# Altium PCB plobot_final.PcbDoc (part 1 of 2)
Units mm, origin at the board's own origin, x right, y up, seen from the top; angles counter-clockwise.
Board outline 90.01 x 133 mm, 2 copper layers (Top Layer, Bottom Layer); 119 components, 93 nets, 451 pads, 126 vias.
Unrouted connection lines stored in the file: 91.
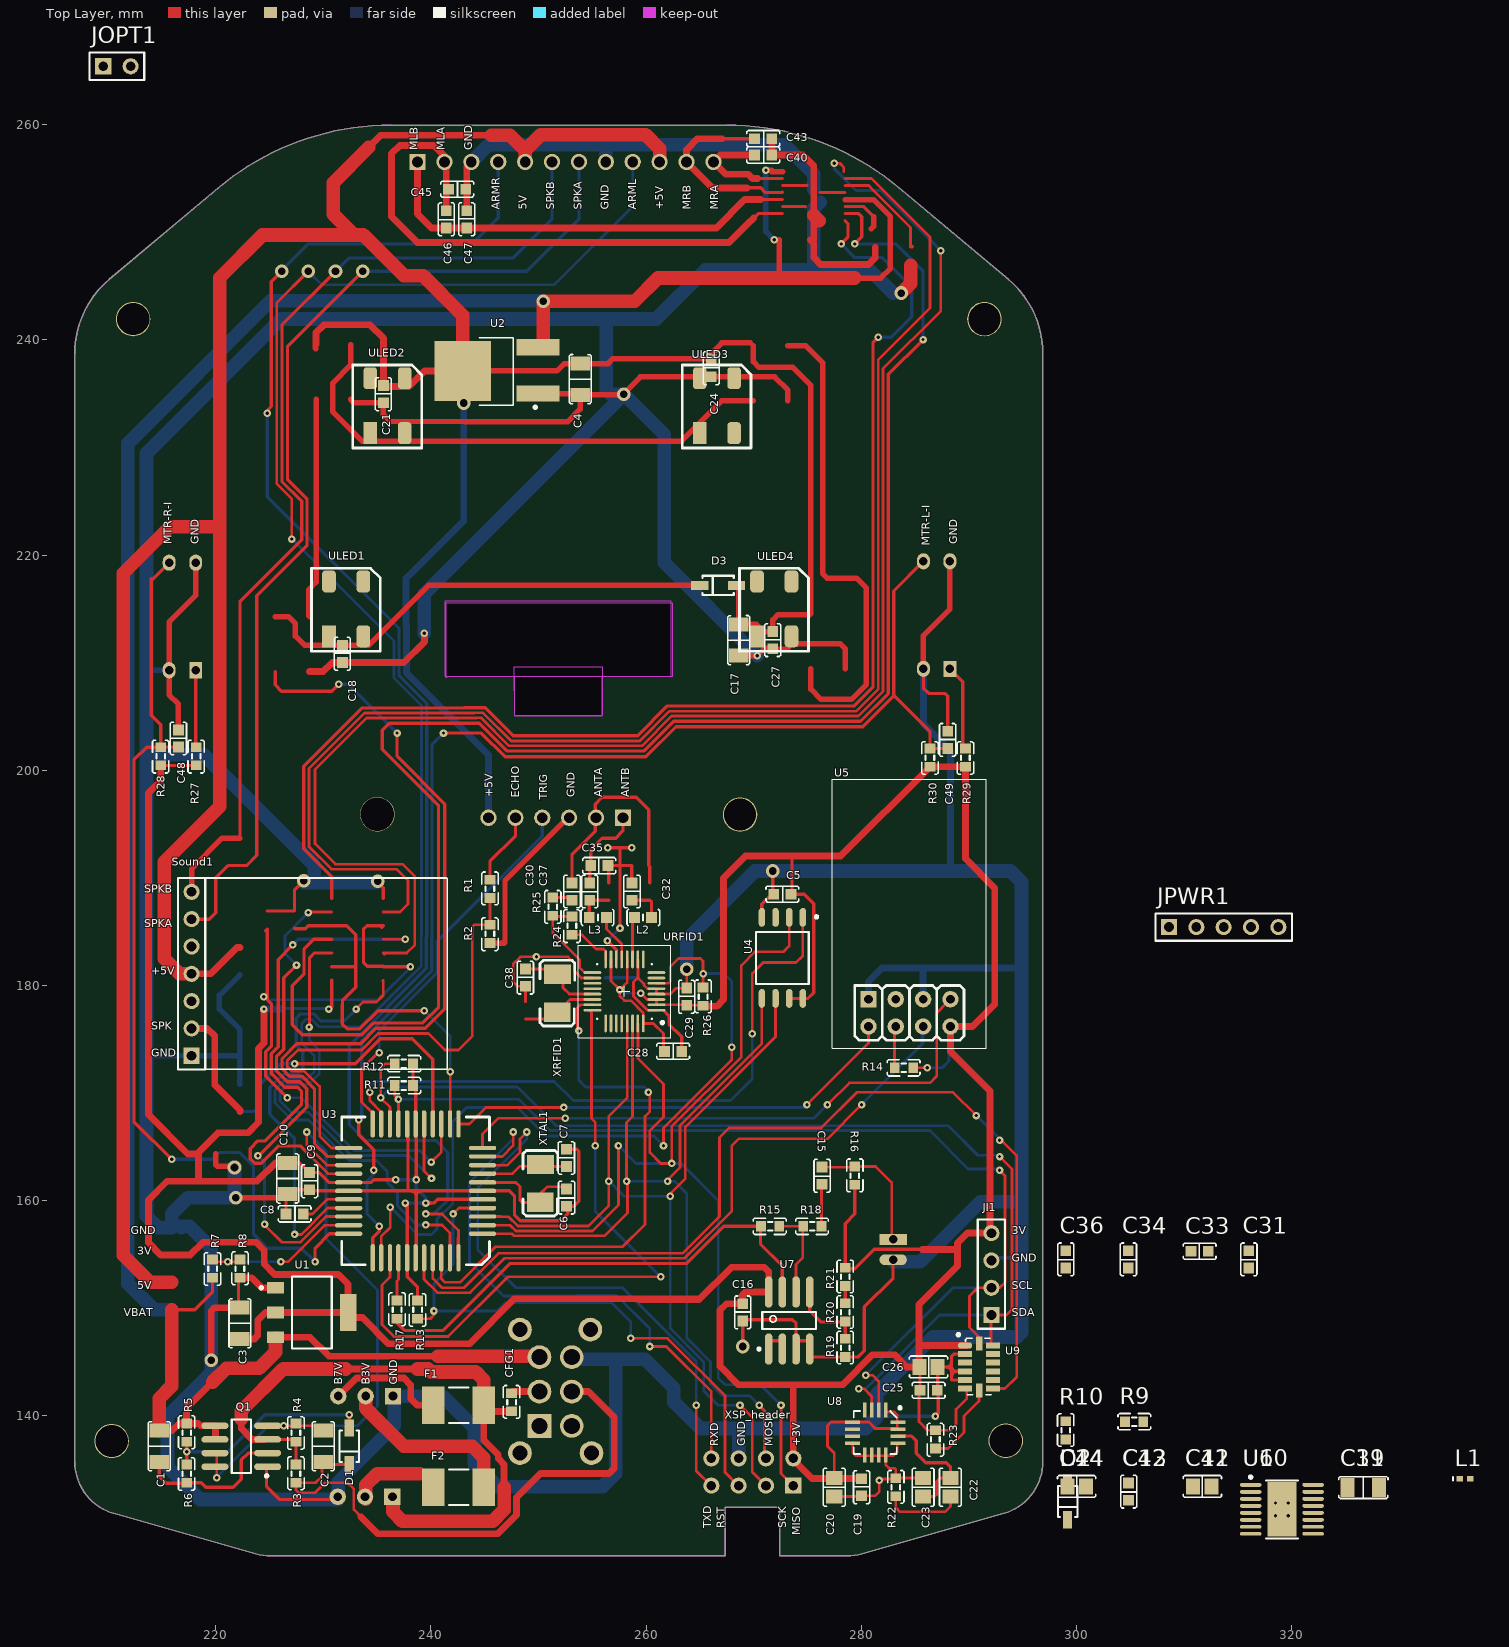
[diagram p0: Top Layer view]
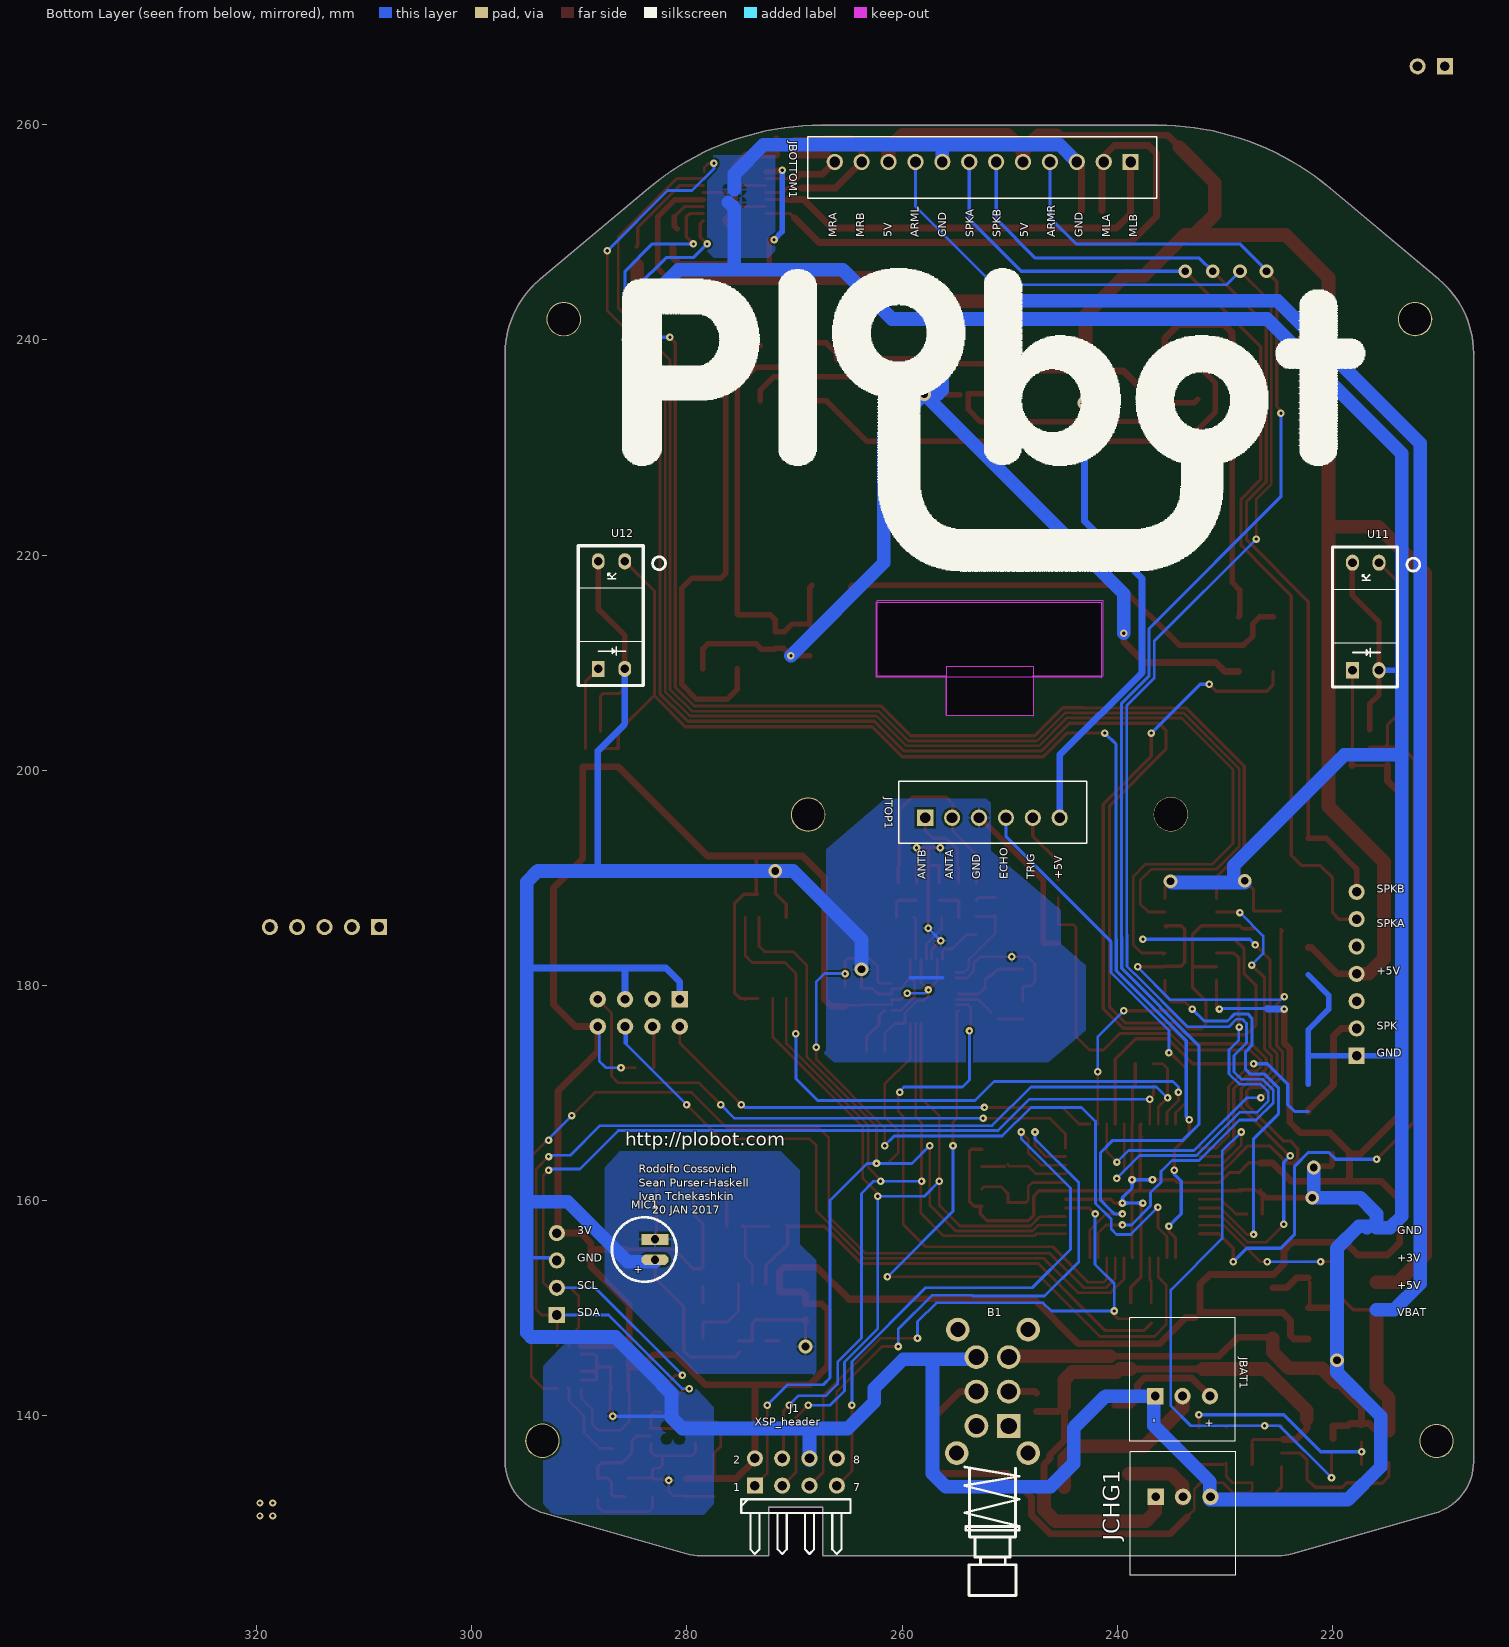
[diagram p1: Bottom Layer view, seen from below]

## Layer stack, top to bottom
Top Layer: signal copper 0.0356
Dielectric: dielectric 0.32, FR-4, Dk 4.8
Bottom Layer: signal copper 0.0356

## Board outline
210.515,130.925 223.715,127.154 ccw(c225.089,131.961) 225.089,126.961 267.36,126.961 267.36,131.508 272.415,131.508 272.415,126.961 278.688,126.961 ccw(c278.688,131.961) 280.062,127.154 293.262,130.925 ccw(c291.889,135.733) 296.889,135.733 296.889,238.727 ccw(c287.889,238.727) 293.674,245.621 293.674,245.622 283.555,254.112 ccw(c267.485,234.961) 267.485,259.961 236.292,259.961 ccw(c236.292,234.961) 220.223,254.112 210.104,245.622 210.103,245.621 ccw(c215.889,238.727) 206.889,238.727 206.883,238.727 206.883,135.733 206.889,135.733 ccw(c211.889,135.733)
cut-out: 262.442,215.576 262.442,208.676 241.542,208.676 241.442,208.576 241.442,215.576
cut-out: 247.752,209.626 255.905,209.626 255.905,205.105 247.777,205.08

## Design rules (kind name [scope] priority, off if disabled: settings)
Clearance [All] p1: gap=0.203
FabricationTestpoint [(IsPad And (OnTopLayer Or OnBottomLayer))] p1: side=3 testpointundercomponent=TRUE minsize=1.016 maxsize=2.54 preferedsize=1.524 minholesize=0 maxholesize=1.016 preferedholesize=0.813 testpointgrid=0.025 allowsidetop=TRUE allowsidebottom=TRUE usegrid=TRUE gridtolerance=0
HoleSize [All] p1: absolutevalues=TRUE maxlimit=3.81 minlimit=0.305 maxpercent=80.000 minpercent=20.000
MinimumSolderMaskSliver [All] p1: minsoldermaskwidth=0.127
PolygonConnect [All] p1: connectstyle=Relief reliefconductorwidth=0.254 reliefentries=4 polygonreliefangle="90 Angle"
RoomDefinition audio [InComponentClass('audio')] p1: confinementstyle=ConfineIn formatcopy=TRUE lockcomponents=FALSE outline 298.044,131.216 302.895,131.216 302.895,137.211 298.044,137.211
RoomDefinition rfid [InComponentClass('rfid')] p2: confinementstyle=ConfineIn formatcopy=TRUE lockcomponents=FALSE outline 195.834,121.412 312.674,121.412 312.674,268.986 195.834,268.986
RoomDefinition motion [InComponentClass('motion')] p3: confinementstyle=ConfineIn formatcopy=TRUE lockcomponents=FALSE outline 185.166,120.142 311.658,120.142 311.658,269.494 185.166,269.494
RoomDefinition inout [InComponentClass('inout')] p4: confinementstyle=ConfineIn formatcopy=TRUE lockcomponents=FALSE outline 186.436,121.666 311.15,121.666 311.15,266.954 186.436,266.954
RoomDefinition cpu [InComponentClass('cpu')] p5: confinementstyle=ConfineIn formatcopy=TRUE lockcomponents=FALSE outline 208.534,116.205 294.386,116.205 294.386,200.152 208.534,200.152
RoomDefinition connections [InComponentClass('connections')] p6: confinementstyle=ConfineIn formatcopy=TRUE lockcomponents=FALSE outline 207.264,121.412 296.926,121.412 296.926,260.35 207.264,260.35
RoutingVias [All] p1: holewidth=0.3 width=0.7 viastyle="Through Hole" minholewidth=0.305 minwidth=0.61 maxholewidth=0.711 maxwidth=1.27
SilkToSilkClearance [All] p1: silktosilkclearance=0.025
SilkscreenOverComponentPads SilkToSolderMaskClearance [IsPad] p1: minsilkscreentomaskgap=0.025
SolderMaskExpansion [All] p1: expansion=0
Width [All] p1: maxlimit=25.4 minlimit=0.203 preferedwidth=0.254
23 further rules are at their usual default settings.

## Classes and differential pairs
component class audio: C11 C12 C13 C14 C15 C16 D2 L1 MIC1 R15 R16 R17 R18 R19 R20 R21 U6 U7
component class inout: C17 C18 C19 C20 C21 C22 C23 C24 C25 C26 C27 D3 R22 R23 U8 U9 ULED1 ULED2 ULED3 ULED4 ULED_INNER1 ULED_OUTER2 ULED_OUTER3
component class motion: B1_1 C11 C12 C13 C14 C40 C43 C45 C46 C47 C48 C49 JSPI R27 R28 R29 R30 U6 U11 U12
component class connections: B1 C1 C2 C3 C4 CFG1 D1 F1 F2 JBAT1 JBOTTOM1 JCHG JCHG1 JI1 Ji2 JOPT1 JPWR1 JTOP JTOP1 Q1 R1 R2 R3 R4 R5 R6 U1 U2
component class rfid: C28 C29 C30 C31 C32 C33 C34 C35 C36 C37 C38 L2 L3 R24 R25 R26 URFID1 XRFID1
component class cpu: C5 C6 C7 C8 C9 C10 J1 R7 R8 R9 R10 R11 R12 R13 R14 R? Sound1 U3 U4 U5 XTAL1

## Components (designator, comment, footprint, x,y, rotation, side; value= is the part's Value field where it differs from the comment)
B1 "PS22F03 non-locked" KGPS22F03 251.427,142.342 r0 bottom locked
C1 "10uF" CAPC3216N 214.757,137.16 r270 top
C2 "1uF" CAPC3216N 229.997,137.16 r90 top
C3 "10uF" CAPC3216N 222.25,148.59 r90 top
C4 "10uF" CAPC3216N 253.873,236.347 r90 top
C5 "100nF" CAPC1608N 272.669,188.468 r180 top
C6 "18pF" CAPC1608N 252.603,160.274 r90 top
C7 "18pF" CAPC1608N 252.603,163.957 r270 top
C8 "100nF" CAPC1608N 227.33,158.75 r180 top
C9 "100nF" CAPC1608N 228.727,161.798 r270 top
C10 "10 uF" CAPC3216N 226.695,162.052 r90 top
C11 "10uF" CAPC3216N 326.669,133.325 r0 top
C12 "10nF/16V" CAPC2012N 311.709,133.426 r0 top
C13 "10uF" CAPC1608N 304.851,132.944 r90 top
C14 "2.2uF" CAPC2012N 300.025,133.426 r0 top
C15 "100nF" CAPC1608N 276.352,162.306 r90 top
C16 "100nF" CAPC1608N 268.986,149.606 r270 top
C17 "10 uF" CAPC3216N 268.605,212.09 r270 top
C18 "100nF" CAPC1608N 231.775,210.82 r270 top
C19 "100nF" CAPC1608N 280.035,133.35 r270 top
C20 "1uF" CAPC2012N 277.495,133.35 r270 top
C21 "100nF" CAPC1608N 235.585,234.95 r270 top
C22 "470nF" CAPC2012N 288.29,133.35 r270 top
C23 "10nF/16V" CAPC2012N 285.75,133.35 r90 top
C24 "100nF" CAPC1608N 266.065,237.363 r270 top
C25 "100nF" CAPC1608N 286.258,142.367 r0 top
C26 "1uF" CAPC2012N 286.258,144.526 r0 top
C27 "100nF" CAPC1608N 271.78,212.09 r270 top
C28 "100nF" CAPC1608N 262.509,173.863 r180 top
C29 "100nF" CAPC1608N 263.779,178.943 r270 top
C30 "100nF" CAPC1608N 253.111,188.722 r90 top
C31 "15pF" CAPC1608N 316.027,154.534 r90 top
C32 "47pF" CAPC1608N 258.699,188.722 r270 top
C33 "180pF" CAPC1608N 311.455,155.296 r0 top
C34 "47pF" CAPC1608N 304.825,154.534 r90 top
C35 "180pF" CAPC1608N 255.651,191.135 r0 top
C36 "15pF" CAPC1608N 299.009,154.534 r90 top
C37 "15pF" CAPC1608N 254.762,188.722 r90 top
C38 "15pF" CAPC1608N 248.793,180.721 r270 top
C39 "10uF" CAPC3216N 326.669,133.325 r0 top
C40 "100nF" CAPC1608N 270.891,257.175 r180 top
C41 "10nF/16V" CAPC2012N 311.709,133.426 r0 top
C42 "100nF" CAPC1608N 304.851,132.944 r90 top
C43 "100nF" CAPC1608N 270.891,258.699 r180 top
C44 "2.2uF" CAPC2012N 300.025,133.426 r0 top
C45 "100nF" CAPC1608N 242.443,254 r180 top
C46 "100nF" CAPC1608N 241.427,251.206 r90 top
C47 "100nF" CAPC1608N 243.332,251.206 r270 top
C48 "100nF" CAPC1608N 216.535,202.946 r270 top
C49 "100nF" CAPC1608N 288.036,202.819 r270 top
CFG1 "NC" RESC1608N 247.5,141.25 r90 top
D1 "MBR0540" SOD123/X.85 232.41,137.16 r90 top
D2 "CDZVT2R3.3B" SOD123/X.85 299.187,132.029 r90 top
D3 "MBR0540" SOD123/X.85 266.7,217.17 r0 top
F1 "miniSMDC260F/12" miniSMDC260F/12 242.57,140.97 r0 top
F2 "miniSMDC260F/12" miniSMDC260F/12 242.57,133.35 r180 top
J1 "XSP" HDR2X4H 273.685,133.499 r180 bottom locked
JBAT1 "Charger" S3B-XH-A(LF)(SN) 233.934,147.32 r270 bottom locked
JBOTTOM1 "Header 12" JST-B12B-XH 238.76,256.54 r0 bottom locked
JCHG1 "Charger" "S3B-XH-A( FEMALE )" 233.883,126.961 r90 bottom
JI1 "Header 4" HDR1X4 292.1,149.352 r90 top
JOPT1 "Header 2" HDR1X2 209.55,265.43 r0 top
JPWR1 "Component" HDR1X5 308.61,185.42 r0 top
JTOP1 "w/lock" JST-B6B-XH 257.854,195.58 r180 bottom locked
L1 "Inductor" INDC1005AL 336.118,134.137 r0 top
L2 "2.2uH" INDC1608N 259.715,186.309 r0 top
L3 "2.2uH" INDC1608N 255.524,186.309 r180 top
MIC1 "Mic2" electret_6mm 283.972,155.448 r270 bottom
Q1 "IRF7319" SO-8_L 222.377,137.16 r180 top
R1 "10k" RESC1608N 245.491,188.976 r90 top
R2 "10K" RESC1608N 245.491,184.785 r270 top
R3 "10K" RESC1608N 227.457,134.62 r90 top
R4 "100K" RESC1608N 227.457,138.43 r270 top
R5 "100K" RESC1608N 217.297,138.43 r90 top
R6 "300K" RESC1608N 217.297,134.62 r270 top
R7 "20k" RESC1608N 219.71,153.67 r270 top
R8 "10k" RESC1608N 222.25,153.67 r90 top
R9 "10k" RESC1608N 305.359,139.446 r0 top
R10 "10k" RESC1608N 299.009,138.633 r90 top
R11 "10k" RESC1608N 237.49,170.688 r0 top
R12 "10k" RESC1608N 237.49,172.72 r0 top
R13 "10k" RESC1608N 238.76,149.86 r270 top
R14 "10k" RESC1608N 283.972,172.339 r180 top
R15 "100k" RESC1608N 271.526,157.607 r180 top
R16 "3.3k" RESC1608N 279.4,162.306 r90 top
R17 "10k" RESC1608N 236.855,149.86 r90 top
R18 "22" RESC1608N 275.463,157.607 r180 top
R19 "10k" RESC1608N 278.511,146.304 r90 top
R20 "10k" RESC1608N 278.511,149.606 r90 top
R21 "10k" RESC1608N 278.511,152.908 r90 top
R22 "10k" RESC1608N 283.21,133.35 r90 top
R23 "10k" RESC1608N 286.893,137.795 r270 top
R24 "820" RESC1608N 253.111,185.547 r270 top
R25 "5.1k" RESC1608N 251.333,187.325 r270 top
R26 "10k" RESC1608N 265.303,178.943 r90 top
R27 "1K" RESC1608N 218.186,201.295 r270 top
R28 "5.1k" RESC1608N 214.884,201.295 r270 top
R29 "1K" RESC1608N 289.687,201.168 r270 top
R30 "5.1k" RESC1608N 286.385,201.168 r270 top
Sound1 "MP3 - M3A3" MP3 217.754,173.457 r90 top
U1 "AZ1117CH-3.3" SOT223 228.6,149.86 r180 top
U2 "AZ1084CD-5.0" AZ1084CD-5.0 245.751,237.109 r180 top
U3 "MCU" atmega644p 237.617,161.163 r270 top locked
U4 "W25Q64BVSIG" W25Q64BVSIG 272.542,182.626 r270 top
U5 "ESP8266" ESP8266 282.981,177.444 r90 top
U6 "DRV8833" DRV8833 319.1,131.293 r0 top
U7 "LM358D" LM358D 273.304,148.844 r90 top
U8 "L3G4200D" LGA16-4X4 281.305,138.43 r270 top
U9 "ADXL345BCCZ" ADXL345 290.957,144.526 r0 top
U10 "DRV8833" DRV8833 319.1,131.293 r0 top
U11 "ITR9608" ITR9608 217.491,213.607 r180 bottom
U12 "ITR9608" ITR9608 287.595,213.734 r180 bottom
ULED1 "WS2812B" WS2812B 232.203,214.962 r90 top locked
ULED2 "WS2812B" WS2812B 236.038,233.854 r90 top locked
ULED3 "WS2812B" WS2812B 266.66,233.854 r90 top locked
ULED4 "WS2812B" WS2812B 271.994,214.962 r90 top locked
URFID1 "MFRC52202HN1" MFRC52202HN1 257.991,179.439 r180 top locked
XRFID1 "7A-27.120MAAJ-T" XTAL 252.095,179.197 r90 top
XTAL1 "ABM7-8.000MHZ-D2Y-T" XTAL 250.52,161.519 r90 top

## Footprints (in the part's own frame and the unit in brackets; to place one, negate y for a bottom-side part, rotate by r counter-clockwise, add the part's x,y. Pads: shape width x height; smd on the part's side, far side on the other; paste and mask are expansions set on the pad)
ADXL345 [mm] "BGA, 14-Leads, Body 5.0x3.0mm,  Pitch 0.80mm"
  oct 1.3x0.55 smd: 1(-1.3,2)
  rect 1.3x0.55 smd: 2(-1.3,1.2) 3(-1.3,0.4) 4(-1.3,-0.4) 5(-1.3,-1.2) 6(-1.3,-2) 8(1.3,-2) 9(1.3,-1.2) 10(1.3,-0.4) 11(1.3,0.4) 12(1.3,1.2) 13(1.3,2)
  rect 0.6x1.3 smd: 7(0,-2.2) 14(0,2.2)
  silkscreen extent -2.05,-2.59 1.12,3.12, body extent -1.5,-2.5 1.5,2.5, height 1
atmega644p [mil]
  oval 16x100 smd: 1(167.45,282.95) 2(136.45,282.95) 3(104.45,282.95) 4(73.45,282.95) 5(41.45,282.95) 6(10.45,282.95) 7(-20.55,282.95) 8(-52.55,282.95) 9(-83.55,282.95) 10(-115.55,282.95) 11(-146.55,282.95) 23(-146.55,-207.05) 24(-115.55,-207.05) 25(-83.55,-207.05) 26(-52.55,-207.05) 27(-20.55,-207.05) 28(10.45,-207.05) 29(41.45,-207.05) 30(73.45,-207.05) 31(104.45,-207.05) 32(136.45,-207.05) 33(167.45,-207.05)
  oval 100x16 smd: 12(-234.55,194.95) 13(-234.55,163.95) 14(-234.55,131.95) 15(-234.55,100.95) 16(-234.55,68.95) 17(-234.55,37.95) 18(-234.55,6.95) 19(-234.55,-25.05) 20(-234.55,-56.05) 21(-234.55,-88.05) 22(-234.55,-119.05) 34(255.45,-119.05) 35(255.45,-88.05) 36(255.45,-56.05) 37(255.45,-25.05) 38(255.45,6.95) 39(255.45,37.95) 40(255.45,68.95) 41(255.45,100.95) 42(255.45,131.95) 43(255.45,163.95) 44(255.45,194.95)
  silkscreen extent -260,-232 280,308, body extent -183,-162 227,244, height 39
AZ1084CD-5.0 [mm] "D-PAK, 3-Pads, Body 6.2x6.7mm (max), IPC Low Density"
  rect 4x1.5 smd: 1(-4.2,2.1) 3(-4.2,-2.2)
  rect 5.25x5.6 smd: 2(2.8,0)
  silkscreen extent -4.08,-3.1 1.27,3.49, body extent -3.61,-3.3 2.59,3.3, height 2.38
CAPC1608N [mm]
  rect 1x1 smd: 1(-0.8,0) 2(0.8,0)
  silkscreen extent -1.52,-0.76 1.52,0.75, body extent -0.87,-0.48 0.87,0.48, height 0.85
CAPC2012N [mm]
  rect 1.3x1.5 smd: 1(-0.85,0) 2(0.85,0)
  silkscreen extent -1.78,-1.02 1.78,1.02, body extent -1.1,-0.72 1.1,0.72, height 1.1
CAPC3216N [mm] "Chip Capacitor, Body 3.2x1.6mm, IPC Medium Density"
  rect 1.3x1.8 smd: 1(-1.45,0) 2(1.45,0)
  silkscreen extent -2.29,-1.02 2.29,1.02, body extent -1.7,-0.9 1.7,0.9, height 1.35
DRV8833 [mm]
  oval 2x0.35 smd: 1(-2.9,2.275) 2(-2.9,1.625) 3(-2.9,0.975) 4(-2.9,0.325) 5(-2.9,-0.325) 6(-2.9,-0.975) 7(-2.9,-1.625) 8(-2.9,-2.275) 9(2.9,-2.275) 10(2.9,-1.625) 11(2.9,-0.975) 12(2.9,-0.325) 13(2.9,0.325) 14(2.9,0.975) 15(2.9,1.625) 16(2.9,2.275)
  rect 2.7x5.08 smd: PP(0,0)
  silkscreen extent -3.02,-2.69 1.51,3.12, body extent -2.25,-2.55 2.25,2.55, height 1.2
electret_6mm [mm]
  oval 1.016x2.54 hole 0.762: 1(0.95,1)
  rect 1.016x2.54 hole 0.762: 2(-0.95,1)
  silkscreen extent -3,-3 3,3
ESP8266 [mil]
  round 60 hole 32: CH_PD(-49.94,-9.12) GPIO0(50.06,-109.12) GPIO2(50.06,-9.12) RST(-49.94,-109.12) RXD(50.06,-209.12) TXD(-49.94,90.88) VCC(-49.94,-209.12)
  rect 60x60 hole 32: GND(50.06,90.88)
  silkscreen extent -130,-341 854,224, body extent -125,-340 845,230, height 164
HDR1X2 [mm] "Connector; Header; 2 Position"
  rect 1.5x1.5 hole 0.9: 1(0,0)
  round 1.5 hole 0.9: 2(2.54,0)
  silkscreen extent -1.27,-1.27 3.81,1.27
HDR1X4 [mm] "Connector; Header; 4 Position"
  rect 1.5x1.5 hole 0.9: 1(0,0)
  round 1.5 hole 0.9: 2(2.54,0) 3(5.08,0) 4(7.62,0)
  silkscreen extent -1.27,-1.27 8.89,1.27, body extent -1.27,-1.27 8.89,1.27, height 4
HDR1X5 [mm] "Connector; Header; 5 Position"
  rect 1.5x1.5 hole 0.9: 1(0,0)
  round 1.5 hole 0.9: 2(2.54,0) 3(5.08,0) 4(7.62,0) 5(10.16,0)
  silkscreen extent -1.27,-1.27 11.43,1.27
HDR2X4H [mm] "Connector; Header; 4x2 Position; Right Angle"
  rect 1.5x1.5 hole 0.9: 1(0,0)
  round 1.5 hole 0.9: 2(0,2.54) 3(2.54,0) 4(2.54,2.54) 5(5.08,0) 6(5.08,2.54) 7(7.62,0) 8(7.62,2.54)
  silkscreen extent -1.27,-6.35 8.89,-1.27, body extent -0.64,-5.94 8.25,3.81, height 5
INDC1005AL [mm] "Chip Inductor, Body 1.0x0.5mm, IPC High Density"
  rect 0.6x0.5 smd: 1(-0.5,0) 2(0.5,0)
  silkscreen extent -1.1,-0.15 -1.1,0.15, body extent -0.55,-0.3 0.55,0.3, height 0.55
INDC1608N [mm]
  rect 1x1 smd: 1(-0.8,0) 2(0.8,0)
  silkscreen extent -1.49,-0.76 1.56,0.76, body extent -0.87,-0.48 0.87,0.48, height 0.71
ITR9608 [mm]
  rect 1.2x1.5 hole 0.8: 1(-0.651,-4.316)
  oval 1.2x1.5 hole 0.8: 2(1.816,-4.316) 3(1.816,5.684) 4(-0.651,5.684)
  silkscreen extent -2.5,-5.87 5.6,7.13, body extent -2.42,-5.82 3.58,7.18, height 10
JST-B6B-XH [mm]
  rect 1.508x1.508 hole 1 mask-25.4: 1(0,0)
  round 1.508 hole 1 mask-25.4: 2(2.5,0) 3(5,0) 4(7.5,0) 5(10,0) 6(12.5,0)
  silkscreen extent -2.45,-2.35 15,3.4, body extent -2.27,-2.25 14.75,3.27, height 4
JST-B12B-XH [mm]
  rect 1.508x1.508 hole 1 mask-25.4: 1(0,0)
  round 1.508 hole 1 mask-25.4: 2(2.5,0) 3(5,0) 4(7.5,0) 5(10,0) 6(12.5,0) 7(15,0) 8(17.5,0) 9(20,0) 10(22.5,0) 11(25,0) 12(27.5,0)
  silkscreen extent -2.45,-2.35 30,3.4, body extent -2.27,-2.25 29.75,3.27, height 4
KGPS22F03 [mm]
  round 2.2 hole 1.4: 0(-3.146,-5.666) 0(-3.146,5.814) 0(3.399,-5.666) 0(3.5,5.814)
  rect 2.2x2.2 hole 1.5: 1(-1.334,3.296)
  round 2.2 hole 1.5: 2(-1.334,0.096) 3(-1.334,-3.104) 4(1.666,-3.104) 5(1.666,0.096) 6(1.666,3.296)
  silkscreen extent -2.32,7.12 2.76,19.04, body extent -3.15,-5.7 3.5,19, height 9
LGA16-4X4 [mm]
  rrect50% 1.4x0.325 smd: 1(-2.1,0.975)
  rect 1.4x0.325 smd paste-25.4: 2(-2.1,0.325) 3(-2.1,-0.325) 4(-2.1,-0.975) 9(2.1,-0.975) 10(2.1,-0.325) 11(2.1,0.325) 12(2.1,0.975)
  rect 0.325x1.4 smd paste-25.4: 5(-0.975,-2.1) 6(-0.325,-2.1) 7(0.325,-2.1) 8(0.975,-2.1) 13(0.975,2.1) 14(0.325,2.1) 15(-0.325,2.1) 16(-0.975,2.1)
  silkscreen extent -2.42,-2 2,2.42, body extent -1.5,-1.5 1.5,1.5, height 0.5
LM358D [mm] "SOIC, 8-Leads, Body 5.0x4.0mm (max), Pitch 1.27mm, IPC Low Density"
  oval 2.9x0.7 smd: 1(-2.65,1.905) 2(-2.65,0.635) 3(-2.65,-0.635) 4(-2.65,-1.905) 5(2.65,-1.905) 6(2.65,-0.635) 7(2.65,0.635) 8(2.65,1.905)
  silkscreen extent -2.77,-2.5 0.8,2.93, body extent -2,-2.5 2,2.5, height 1.75
MFRC52202HN1 [mm] "QFN, 32-Leads, Body 5.1x5.1mm (max), Pitch 0.50mm, IPC Low Density"
  oval 1.65x0.25 smd: 1(-2.975,1.75) 2(-2.975,1.25) 3(-2.975,0.75) 4(-2.975,0.25) 5(-2.975,-0.25) 6(-2.975,-0.75) 7(-2.975,-1.25) 8(-2.975,-1.75) 17(2.975,-1.75) 18(2.975,-1.25) 19(2.975,-0.75) 20(2.975,-0.25) 21(2.975,0.25) 22(2.975,0.75) 23(2.975,1.25) 24(2.975,1.75)
  oval 0.25x1.65 smd: 9(-1.75,-2.975) 10(-1.25,-2.975) 11(-0.75,-2.975) 12(-0.25,-2.975) 13(0.25,-2.975) 14(0.75,-2.975) 15(1.25,-2.975) 16(1.75,-2.975) 25(1.75,2.975) 26(1.25,2.975) 27(0.75,2.975) 28(0.25,2.975) 29(-0.25,2.975) 30(-0.75,2.975) 31(-1.25,2.975) 32(-1.75,2.975)
  silkscreen extent -4.3,-4.3 4.3,4.3
miniSMDC260F/12 [mm] "Chip Capacitor, 2-Leads, Body 5.3x3.2mm, IPC Low Density"
  rect 2.1x3.5 smd: 1(-2.35,0) 2(2.35,0)
  silkscreen extent -0.9,-1.65 0.9,1.65, body extent -2.75,-1.71 2.75,1.7, height 1.52
MP3 [mm] "Connector; Header; 7 Position"
  rect 1.5x1.5 hole 0.9: 1(0,0)
  round 1.5 hole 0.9: 2(2.54,0) 3(5.08,0) 4(7.62,0) 5(10.16,0) 6(12.7,0) 7(15.24,0)
  silkscreen extent -1.27,-23.75 16.52,1.27, body extent -1.27,-23.5 16.51,1, height 4.5
RESC1608N [mm]
  rect 0.9x1 smd: 1(-0.85,0) 2(0.85,0)
  silkscreen extent -1.49,-0.76 1.56,0.76, body extent -0.85,-0.48 0.85,0.48, height 0.6
"S3B-XH-A( FEMALE )" [mil]
  rect 60x60 hole 32: 1(216.54,100)
  round 60 hole 32: 2(216.54,0) 3(216.54,-100)
  silkscreen extent -71,-193 382,193, body extent -75,-175 350,175, height 157
S3B-XH-A(LF)(SN) [mil]
  rect 60x60 hole 32: 1(216.54,-100)
  round 60 hole 32: 2(216.54,0) 3(216.54,100)
  silkscreen extent -71,-193 382,193, body extent -75,-175 350,175, height 157
SO-8_L [mm] "SOIC, 8-Leads, Body 4.9x3.9mm, Pitch 1.27mm, IPC High Density"
  oval 2.5x0.6 smd: 1(-2.45,1.905) 2(-2.45,0.635) 3(-2.45,-0.635) 4(-2.45,-1.905) 5(2.45,-1.905) 6(2.45,-0.635) 7(2.45,0.635) 8(2.45,1.905)
  silkscreen extent -2.48,-2.5 0.89,2.88, body extent -2,-2.5 2,2.5, height 1.75
SOD123/X.85 [mm] "SOD-123; 2 Leads; Body 2.7 x 1.6 mm, (LxW)"
  rect 1.6x0.85 smd: 1(-1.7,0) 2(1.7,0)
  silkscreen extent -1.45,-0.9 1.45,0.9, body extent -1.3,-0.56 1.07,0.53, height 0.53
SOT223 [mm]
  rect 1.55x1.1 smd: 1(3.045,-2.031) 2(3.045,0.269) 3(3.045,2.569)
  rect 1.55x3.45 smd: 2(-3.705,0.269)
  silkscreen extent -2.18,-3.08 4.49,3.62, body extent -2.11,-3.01 1.49,3.59, height 4
W25Q64BVSIG [mm]
  oval 1.75x0.6 smd: 1(-3.697,2.033) 2(-3.697,0.763) 3(-3.697,-0.507) 4(-3.697,-1.777) 5(3.839,-1.777) 6(3.839,-0.507) 7(3.839,0.763) 8(3.839,2.033)
  silkscreen extent -3.86,-2.32 2.48,3.43, body extent -2.29,-2.34 2.51,2.52, height 0.8
WS2812B [mil]
  rect 80x50 smd: 1(-99.17,66.06)
  rrect50% 80x50 smd: 2(-99.17,-59.92) 3(101.62,-59.92) 4(101.62,66.06)
  silkscreen extent -154,-122 150,130, body extent -99,-95 98,101, height 30
XTAL [mm]
  rect 1.8x2.5 smd: 1(1.834,0.329) 2(-1.691,0.354)
  silkscreen extent -2.97,-1.27 3.13,1.95, body extent -2.2,-0.89 2.49,1.4, height 2.54

## Part data
B1: library part Component_1
C1 C2 C3 C4 C10 C11 C17 C20 C22 C23 C26 C39: library part Cap_2, "Capacitor"
C5 C6 C7 C8 C9 C12 C13 C14 C15 C16 C18 C19 C21 C24 C25 C27 C28 C29 C30 C31 C32 C33 C34 C35 C36 C37 C38 C40 C41 C42 C43 C44 C45 C46 C47 C48 C49: library part Cap, "Capacitor"
CFG1 R1 R2 R3 R4 R5 R6 R7 R8 R9 R10 R11 R12 R13 R14 R15 R16 R17 R18 R19 R20 R21 R22 R23 R24 R25 R26 R27 R28 R29 R30: library part Res2, "Resistor"
D1 D2 D3: library part Diode, "Default Diode"
F1 F2: library part "Fuse Thermal", "Thermal Fuse"
J1: library part "Header 4X2H", "Header, 4-Pin, Dual row, Right Angle"
JBAT1 JCHG1: library part BATTCON
JBOTTOM1: "Header, 12-Pin"
JI1: "Header, 4-Pin"
JOPT1: "Header, 2-Pin"
JPWR1: library part "Header 5", "Header, 5-Pin"
JTOP1: library part "Header 6", "Header, 6-Pin"
L2 L3: library part Inductor, "Inductor"
MIC1: "Microphone"
Q1: "HEXFET Power MOSFET"
Sound1: library part "Header 7", "Header, 7-Pin"
U1: library part LM1117
U3: library part ATmega644-20AU, "8-bit AVR Microcontroller, 2.7-5.5V, 20MHz, 64KB Flash, 2KB EEPROM, 4KB SRAM, 44-pin TQFP"
U7: "Dual Operational Amplifier"
U8: "L3G4200D Series 2.4 - 3.6 V Three-axis Angular Rate MEMS Motion Sensor - LGA-16"
U9: library part ADXL345
XRFID1: library part Tm08B.S01_12M_42

## Free pads (board coordinates)
  round 3.2 hole 3 unplated: 7(210.327,137.646) 8(293.434,137.668) 9(291.453,241.924) 10(212.321,241.931) 12(268.739,195.872)
  round 3.2 hole 3.1 unplated: 11(235.025,195.9)

## Via types
v1: diameter 0.7, hole 0.305, Top Layer to Bottom Layer, 101 vias
v2: diameter 1.27, hole 0.711, Top Layer to Bottom Layer, 16 vias
v3: diameter 0.66, hole 0.305, Top Layer to Bottom Layer, 8 vias
v4: diameter 0.701, hole 0.305, Top Layer to Bottom Layer, 1 vias

## Nets (pads, with @x,y where several pads share a name; then routed paths per layer and width w, separated by ;. In a path a pad name is that pad's centre, name@x,y a point inside that pad or via, vN(x,y) a via of type N, cw(c..) or ccw(c..) an arc to the next point about the centre after c; other vN are vias at no path point)
ANT-A: C30.2 C31.2 C33.2 JTOP1.2 | length 21
  Top Layer w0.305: C30.2@253.111,189.522 253.111,192.151 255.27,194.31 JTOP1.2@255.27,195.496 ; 260.35,189.522 260.35,191.046 260.261,191.135 260.261,196.304 259.08,197.485 255.905,197.485 255.27,196.85 JTOP1.2@255.27,195.664 ; JTOP1.2@255.27,195.496 JTOP1.2@255.354,195.58 JTOP1.2@255.27,195.664 ; JTOP1.2@255.27,195.496 JTOP1.2@255.27,195.664
ANT-B: C35.1 C37.2 JTOP1.1 | length 8
  Top Layer w0.305: C37.2@254.762,189.522 C35.1@254.762,191.046 ; C35.1@254.851,191.135 254.851,192.621 255.905,193.675 257.175,193.675 257.854,194.354 JTOP1.1@257.854,195.58
AXL-INT: U9.8 | length 94.2
  Top Layer w0.254: 240.181,154.675 240.181,152.757 241.046,151.892 243.078,151.892 246.278,155.092 263.39,155.092 266.827,158.53 266.827,165.862 267.716,166.751 276.279,166.751 279.581,170.053 288.544,170.053 v1(290.703,167.894) ; U9.8@292.057,142.526 293.37,142.526 294.462,143.618 294.462,164.135 v1@293.116,165.481
  Bottom Layer w0.254: v1(290.703,167.894) v1@293.116,165.481
  other v1: 292.862,165.608
BATT_3.7V: F2.2 JCHG1.2 | length 6.8
  Top Layer w1.27: JCHG1.2@233.934,132.246 233.934,133.528 235.026,134.62 238.95,134.62
BATT_LVL: R7.1 R8.2 U3.32 | length 15.3
  Top Layer w0.254: R7.1@219.495,154.52 R7.1@219.71,154.305 ; R7.1@219.964,154.305 v1(221.107,154.305) R8.2@222.289,154.305 ; v1(226.06,154.305) 226.707,154.305 230.099,157.697 U3.32@232.358,157.697
  Bottom Layer w0.254: v1(221.107,154.305) v1(226.06,154.305)
CS_FLASH: U3.21 U4.1 | length 60
  Top Layer w0.254: v1(234.315,170.053) 234.315,169.291 235.381,168.225 U3.21@235.381,167.121 ; v1(269.875,175.514) 269.875,181.102 270.891,182.118 273.939,182.118 274.575,182.754 U4.1@274.575,186.323
  Bottom Layer w0.254: v1(234.315,170.053) 234.315,170.561 234.823,171.069 251.46,171.069 253.238,169.291 267.843,169.291 269.875,171.323 v1(269.875,175.514)
DBG: JPWR1.4 U3.36
ECHO: R1.1 R2.1 U3.23 | length 45.9
  Top Layer w0.254: U3.23@232.358,164.885 230.77,164.885 229.661,165.995 229.661,170.603 228.225,172.04 227.048,172.04 226.65,172.438 226.65,173.002 227.646,173.998 233.572,173.998 235.093,175.518 239.772,175.518 241.3,173.99 242.57,173.99 243.84,175.26 243.84,185.42 244.055,185.635 R2.1@245.491,185.635 R1.1@245.491,188.126
GND: B1.4 C3.2 C4.1 C5.2 C6.1 C7.1 C8.2 C9.2 C10.1 C11.1 C12.1 C14.1 C16.2 C17.2 C18.2 C19.2 C20.2 C21.2 C23.2 C24.2 C25.2 C26.2 C27.2 C28.1 C29.1 C32.1 C33.1 C34.2 C35.2 C36.2 C38.2 C39.1 C40.1 C41.1 C43.1 C44.1 C45.1 C47.1 C48.1 C49.1 D2.2 J1.6 JBAT1.1 JBOTTOM1.3 JBOTTOM1.8 JCHG1.1 JI1.1 JPWR1.5 JTOP1.6 MIC1.2 Q1.1 R2.2 R8.1 R9.1 R10.1 R19.1 R22.2 Sound1.1 U1.1 U2.1 U3.6 U3.18 U3.28 U3.39 U4.4 U5.GND U5.GPIO0 U6.3 U6.6 U6.13 U6.PP U7.4 U7.5 U8.8 U8.9 U8.10 U8.11 U8.12 U8.13 U9.2 U9.4 U9.5 U10.3 U10.6 U10.13 U10.PP U11.2 U11.4 U12.2 U12.4 ULED1.3 ULED2.3 ULED3.3 ULED4.3 URFID1.1 URFID1.4 URFID1.5 URFID1.10 URFID1.14 URFID1.18 | length 965.8
  Top Layer w0.254: C10.1@226.695,160.998 C10.1@226.784,160.909 ; 248.793,178.473 C38.2@248.793,179.921 248.069,179.921 247.65,180.34 247.65,181.991 248.31,182.651 252.763,182.651 253.346,182.068 253.346,181.324 253.981,180.689 URFID1.18@255.016,180.689 ; URFID1.14@257.241,182.414 257.241,183.322 ; URFID1.10@259.241,182.414 259.241,180.709 258.826,180.294 258.826,178.985 260.122,177.689 URFID1.1@260.966,177.689 ; 259.251,180.699 259.811,180.139 259.811,180 260.122,179.689 URFID1.5@260.966,179.689 URFID1.4@260.966,179.189 262.255,179.189 262.809,179.743 C29.1@263.779,179.743 v2(263.779,181.483) ; C20.2@277.495,132.5 C19.2@280.123,132.5 ; U8.8@279.205,137.455 279.205,136.593 279.527,136.271 281.63,136.271 U8.12@282.28,136.271 ; C19.2@280.035,132.55 281.267,132.55 281.686,132.969 281.686,133.858 281.94,134.112 R22.2@283.21,134.112 ; U8.12@282.28,136.33 U8.12@282.28,136.271 ; U8.13@283.337,137.414 283.337,136.652 282.956,136.271 U8.12@282.28,136.271 ; C23.2@285.535,134.2 R22.2@283.21,134.2 283.21,135.001 283.083,135.128 282.575,135.128 282.28,135.423 U8.12@282.28,136.271
  Top Layer w0.305: C3.2@222.123,149.987 222.123,150.04 R8.1@222.123,152.4 ; Q1.1@224.727,135.255 224.727,133.413 225.933,132.207 231.394,132.207 ; 224.79,186.905 227.33,186.905 227.33,188.874 v2(228.168,189.713) ; C8.2@226.53,158.75 C10.1@226.53,160.602 ; C10.1@226.732,160.565 227.165,160.998 C9.2@228.727,160.998 ; C9.2@228.484,160.898 U3.28@232.358,160.898 234.061,160.898 237.871,160.898 ; v2@235.014,189.625 235.572,189.067 235.572,188.087 ; U3.18@237.794,167.121 237.871,167.043 237.871,160.898 ; U3.39@238.581,154.675 238.633,154.727 238.633,160.898 ; C7.1@252.603,164.757 253.581,164.757 253.746,164.592 253.746,159.944 253.276,159.474 C6.1@252.603,159.474 252.73,159.347 252.73,158.75 252.095,158.115 248.285,158.115 247.777,158.623 247.777,159.64 247.777,160.401 247.28,160.898 U3.6@244.804,160.898 238.633,160.898 ; v1(256.413,184.15) 257.241,183.322 ; v1(256.451,192.786) 257.577,192.786 ; 256.54,189.522 256.54,191.046 C35.2@256.451,191.135 257.577,191.135 ; v1(257.577,185.314) 257.577,191.135 ; v1(258.661,192.786) 257.577,192.786 ; C32.1@258.699,189.522 258.661,189.56 258.661,191.135 257.577,191.135 ; URFID1.1@261.62,177.673 262.128,177.165 262.128,176.53 262.128,176.403 263.309,175.222 C28.1@263.309,173.863 ; v2(268.986,146.431) C16.2@268.986,148.806 ; C16.2@268.986,148.927 273.602,148.927 273.939,148.59 273.939,146.956 U7.4@275.209,146.956 ; U4.4@270.765,186.323 270.765,187.542 271.78,188.557 v2(271.78,190.627) ; U7.4@275.082,145.923 275.551,145.454 R19.1@278.511,145.454 279.693,145.454 280.289,146.05 280.289,150.114 282.956,152.781 282.956,154.432 ; 276.098,251.079 276.109,251.09 ; U12.2@285.778,209.417 285.778,207.617 286.258,207.137 287.782,207.137 288.036,206.883 C49.1@288.036,203.619 ; C25.2@287.02,142.494 287.102,142.412 287.147,142.367 287.147,140.208 ; C26.2@287.02,144.526 C26.2@287.108,144.526 ; C25.2@287.058,142.367 287.108,142.417 C26.2@287.108,144.526 ; U9.2@289.8,145.669 289.857,145.726 288.601,145.726 288.398,145.523 288.398,144.526 ; U9.5@289.857,143.326 288.398,143.326 288.398,144.126 ; U9.4@289.857,144.126 288.398,144.126 ; 237.871,160.898 238.633,160.898 ; 257.577,191.135 257.577,192.786 ; C26.2@287.108,144.526 288.398,144.526 ; 288.398,144.126 288.398,144.526
  Top Layer w0.508: C48.1@216.535,203.746 216.535,206.149 215.674,207.01 U11.2@215.674,209.29 215.674,213.769 218.141,216.236 U11.4@218.141,219.29 ; 220.002,164.338 220.002,163.309 220.123,163.189 221.621,163.189 v2(221.742,163.068) ; v2(221.869,160.274) 226.187,160.274 C10.1@226.568,160.655 ; 232.535,234.463 232.848,234.15 C21.2@235.585,234.15 235.585,233.045 236.22,232.41 243.18,232.41 243.205,232.385 252.705,232.385 253.873,233.553 C4.1@253.873,234.897 ; R2.2@245.491,183.935 246.8,183.935 246.888,184.023 ; 246.761,184.023 246.888,184.15 246.888,189.738 252.476,195.326 252.476,195.58 252.486,195.59 252.603,195.707 ; U2.1@250.453,235.009 C4.1@253.873,235.009 ; C4.1@254.635,234.897 v2@257.81,234.897 ; v2@257.9,234.987 259.476,236.563 C24.2@266.065,236.563 271.952,236.563 273.182,235.332 273.182,234.335 ; C17.2@268.605,210.64 v1(270.334,210.64) 271.022,211.328 271.742,211.328 C27.2@271.78,211.29 271.844,211.226 273.05,211.226 273.583,211.76 278.028,211.76 278.516,211.272 278.516,209.443 ; U12.2@285.778,209.417 285.778,212.499 288.245,214.966 U12.4@288.245,219.335
  Top Layer w0.635: v2(219.583,145.161) 219.583,149.733 219.89,150.04 222.123,150.04 C3.2@222.25,150.04 ; R8.1@222.25,152.82 223.354,152.82 224.282,151.892 U1.1@225.552,151.892 ; 228.725,209.165 229.993,209.165 230.848,210.02 C18.2@231.775,210.02 237.477,210.02 239.395,211.938 v1(239.395,212.725) ; C47.1@243.332,252.006 243.332,256.112 JBOTTOM1.3@243.76,256.54 ; C16.2@268.986,148.806 C16.2@268.986,148.927 ; C43.1@271.691,258.699 C40.1@271.691,257.175 274.574,257.175 275.59,256.159 275.59,253.365 275.59,252.765 275.59,251.587 275.59,249.301 ; 275.262,249.301 275.59,248.973 275.59,247.65 276.225,247.015 280.67,247.015 281.305,247.65 281.305,248.578
  Top Layer w1.27: 275.59,251.587 276.098,251.079 ; v2(283.718,244.348) 284.607,245.237 284.607,246.927
  Bottom Layer w0.254: v1(256.413,184.15) v1(257.577,185.314)
  Bottom Layer w0.305: 256.213,180.709 257.483,180.709 259.261,180.709 ; v2(268.986,146.431) v2@269.367,146.431 ; U5.GND@280.543,178.562 U5.GND@280.543,178.716 ; 281.559,139.954 v1(286.893,139.954) ; U5.GPIO0@285.496,178.435 U5.GPIO0@285.623,178.308 ; 292.1,154.686 294.386,154.686
  Bottom Layer w0.508: 213.569,209.296 U11.2@215.674,209.296 ; 213.696,173.457 Sound1.1@217.754,173.457 222.148,173.457 222.25,173.355 ; 222.25,170.815 222.25,173.355 ; 222.25,180.975 220.345,179.07 220.345,177.8 222.25,175.895 222.25,173.355
  Bottom Layer w0.635: U5.GND@280.673,178.716 280.673,180.343 281.94,181.61 294.894,181.61 ; U5.GPIO0@285.753,178.716 285.753,181.607 ; U12.2@285.778,209.417 285.778,204.315 288.29,201.803 288.29,190.627
  Bottom Layer w1.27: 216.789,157.48 216.662,157.607 217.551,157.607 219.583,155.575 v2(219.583,145.161) 219.583,144.018 215.519,139.954 215.519,135.255 218.567,132.207 231.394,132.207 ; v2@221.742,160.401 v2(221.742,163.068) ; v2(221.869,160.274) 217.424,160.274 215.9,158.75 215.9,157.48 214.63,157.48 213.569,158.541 213.569,201.422 ; v2@228.168,189.56 v2@234.95,189.56 ; 229.173,190.054 229.173,191.146 218.897,201.422 213.569,201.422 ; 231.394,132.246 231.394,133.858 236.601,139.065 JBAT1.1@236.601,141.82 ; JBAT1.1@236.474,141.82 JBAT1.1@236.601,141.82 ; JBAT1.1@236.601,141.859 JBAT1.1@236.601,141.82 ; v1(239.395,212.725) 239.395,216.408 v2(257.937,234.95) ; JBOTTOM1.3@243.76,256.54 245.352,258.132 272.879,258.132 275.59,255.421 275.59,253.965 ; B1.4@253.093,145.446 253.297,145.243 257.175,145.243 ; JBOTTOM1.8@256.26,256.54 256.26,258.03 ; 256.286,235.331 256.286,241.935 ; 256.667,234.95 v2(257.937,234.95) ; v2(263.779,181.483) 263.779,184.277 270.129,190.627 v2(271.78,190.627) 288.29,190.627 293.878,190.627 294.894,189.611 294.894,181.61 294.894,159.893 ; J1.6@268.605,135.89 J1.6@268.605,136.039 268.605,138.811 ; v1(270.334,210.64) 261.7,219.274 261.7,231.187 v2(257.937,234.95) ; 276.161,252.793 275.59,252.222 275.59,246.507 ; 282.27,142.856 281.432,142.018 281.432,139.827 280.416,138.811 268.605,138.811 ; 282.27,142.951 286.639,147.32 294.513,147.32 ; 282.956,244.348 280.797,246.507 275.59,246.507 ; 282.972,154.305 285.496,154.305 291.084,159.893 294.894,159.893 ; 294.894,147.701 294.894,159.893 ; 213.569,201.422 213.569,209.296 213.569,229.444 226.06,241.935 256.286,241.935 ; JBAT1.1@236.601,141.82 241.085,141.82 244.058,138.847 244.058,135.545 246.198,133.405 255.96,133.405 257.175,134.62 257.175,145.243 ; 256.286,241.935 260.934,241.935 265.506,246.507 275.59,246.507 ; 257.175,145.243 259.887,145.243 262.587,142.543 262.587,141.273 265.049,138.811 268.605,138.811
  other v1: 281.686,133.985 249.809,182.651
  other v2: 235.052,189.662
  other v3: 318.5,130.693 319.7,130.693 318.5,131.893 319.7,131.893
LEDS: U3.24 ULED1.4 | length 73
  Top Layer w0.305: 225.525,209.165 225.525,207.924 226.109,207.34 230.784,207.34 v1(231.445,208.001) ; U3.24@232.358,164.098 230.364,164.098 229.179,165.283 229.179,170.403 228.025,171.557 226.848,171.557 226.167,172.238 226.167,173.202 227.54,174.574 233.466,174.574 234.893,176.001 239.465,176.001 241.3,177.836 241.3,196.85 236.855,201.295 v1(236.855,203.454)
  Bottom Layer w0.305: v1(231.445,208.001) 232.308,208.001 v1(236.855,203.454)
MIC: D2.1 R17.2 U3.37 | length 4.7
  Top Layer w0.254: R17.2@236.855,150.495 R17.2@236.855,150.71 236.855,151.765 ; 236.855,151.345 236.855,151.765 ; 236.981,153.035 U3.37@236.981,154.675 ; 236.982,153.035 236.982,152.654 236.855,152.527 236.855,151.765
MISO: J1.1 U3.2 U4.2 URFID1.31 | length 107.3
  Top Layer w0.254: U3.2@244.804,157.697 247.374,157.697 247.896,157.175 255.016,157.175 257.429,159.588 v1(257.429,165.1) ; URFID1.31@259.241,176.464 259.241,173.194 261.62,170.815 261.62,167.767 260.35,166.497 260.35,164.465 261.366,163.449 v1(262.382,163.449) 262.382,166.866 268.859,173.343 268.859,181.864 270.129,183.134 272.796,183.134 273.305,183.643 U4.2@273.305,186.323 ; v1(272.542,140.97) 272.542,134.62 J1.1@273.685,133.477
  Bottom Layer w0.254: v1(257.429,165.1) 259.08,163.449 v1(262.382,163.449) 263.271,163.449 266.7,160.02 266.7,143.51 267.335,142.875 270.637,142.875 v1(272.542,140.97) ; J1.1@273.685,133.223 J1.1@273.685,133.499
MOSI: J1.4 U3.1 U4.5 URFID1.30 | length 87.9
  Top Layer w0.254: U3.1@244.804,156.91 246.253,156.91 247.515,156.91 247.706,156.718 256.145,156.718 258.267,158.84 258.267,161.722 v1(258.191,161.798) 258.191,167.259 258.741,167.809 URFID1.30@258.741,176.464 ; v1@262.001,161.925 263.144,163.068 263.144,166.982 270.765,174.603 U4.5@270.765,178.787 ; v1(270.51,140.97) 271.018,140.462 J1.4@271.018,136.144
  Bottom Layer w0.254: v1(258.191,161.798) v1(262.001,161.798) 262.636,161.798 263.779,160.655 263.779,147.216 265.991,145.004 265.991,142.949 267.081,141.859 269.621,141.859 v1(270.51,140.97)
MTR-L-A: U3.13 U10.16 | length 37.3
  Top Layer w0.254: U3.13@241.781,167.121 241.808,167.147 v1(241.808,171.958)
  Top Layer w0.305: 227.318,185.318 227.369,185.268 228.321,185.268 228.6,185.547 230.772,185.547 232.181,185.547 233.02,184.709 233.02,181.737 ; 230.772,181.737 233.02,181.737 ; v1(239.395,177.648) 235.102,177.648 233.401,175.946 232.207,175.946 231.75,176.403 231.75,178.206 231.775,178.232 231.775,178.562 233.02,179.807 233.02,181.737
  Bottom Layer w0.254: v1(239.395,177.648) 241.808,175.235 v1(241.808,171.958)
MTR-L-B: U3.14 U10.15 | length 62.6
  Top Layer w0.254: v1(240.03,163.576) 240.969,164.515 U3.14@240.969,167.121
  Top Layer w0.305: 224.649,185.064 224.79,185.205 224.79,178.664 225.191,178.263 225.191,174.381 224.643,173.833 224.643,171.546 v1(226.644,169.545) ; 235.42,185.395 235.572,185.547 234.061,185.547 233.731,185.217 233.731,185.166 233.731,182.129 234.072,181.788 235.521,181.788 235.572,181.737 v1(238.1,181.737)
  Bottom Layer w0.254: v1@224.485,178.994 224.815,178.664 227.533,178.664 ; v1(226.644,169.545) 227.965,169.545 232.867,164.643 238.963,164.643 v1(240.03,163.576) ; 226.695,178.664 227.533,178.664 ; v1@238.138,181.699 235.102,178.664 227.533,178.664
  other v1: 224.46,178.943
MTR-L-I: C49.2 R30.1 U3.34 U12.3 | length 119.5
  Top Layer w0.305: v1(233.299,167.513) 233.299,166.116 234.696,164.719 v1(234.696,162.814) ; U3.34@234.593,154.675 234.593,156.536 235.204,157.146 v1(235.204,157.607) ; v1(241.173,203.454) 244.683,203.454 246.892,201.244 259.99,201.244 262.784,204.038 280.144,204.038 283.018,206.913 283.018,206.985 ; U12.3@285.778,219.417 283.018,216.657 283.018,206.985 ; R30.1@286.385,202.018 286.385,203.618 283.018,206.985 ; R30.1@286.513,202.019 C49.2@288.036,202.019
  Bottom Layer w0.305: 233.553,167.767 233.578,167.792 233.578,174.853 240.086,181.361 240.086,184.29 240.112,184.315 240.112,202.393 v1(241.173,203.454) ; 234.696,162.433 234.061,161.798 234.061,158.75 v1(235.204,157.607)
MTR-L-OA: C40.2 C42.2 JBOTTOM1.12 U10.2 | length 11.5
  Top Layer w0.305: 270.383,254.99 272.69,254.99
  Top Layer w0.635: 268.351,255.397 267.97,255.397 ; C40.2@270.091,257.175 266.895,257.175 JBOTTOM1.12@266.26,256.54 267.403,255.397 267.97,255.397 ; 270.383,254.99 269.901,254.99 269.494,255.397 267.97,255.397
MTR-L-OB: C42.1 C43.2 JBOTTOM1.11 U10.4 | length 18
  Top Layer w0.305: 267.081,258.699 267.462,258.699 268.351,258.699 C43.2@270.091,258.699 ; 269.367,254.127 270.662,254.127 271.099,253.69 272.69,253.69 272.667,253.713
  Top Layer w0.635: 267.081,258.699 264.795,258.699 263.76,257.664 JBOTTOM1.11@263.76,256.54 266.173,254.127 269.367,254.127
MTR-R-A: U3.15 U10.9 | length 28.6
  Top Layer w0.305: v1(227.33,172.72) 232.977,172.72 235.292,175.036 238.273,175.036 240.181,173.128 U3.15@240.181,167.121
  Bottom Layer w0.305: 222.25,168.275 223.52,168.275 224.155,168.91 224.155,170.815 226.06,172.72 v1(227.33,172.72)
MTR-R-B: U3.16 U10.10 | length 40.8
  Top Layer w0.254: U3.16@239.368,167.121 239.35,167.102 239.35,162.758 v1(240.055,162.052)
  Top Layer w0.305: v1@228.721,176.423 228.721,182.57 229.159,183.007 230.772,183.007
  Bottom Layer w0.254: v1(228.676,176.124) 228.702,176.149 228.702,174.916 229.61,174.007 229.61,171.766 228.659,170.815 226.695,170.815 225.964,170.084 225.964,169.263 227.028,168.199 228.625,168.199 232.639,164.186 237.922,164.186 v1(240.055,162.052)
MTR-R-I: C48.2 R28.1 U3.33 U11.3 | length 87.9
  Top Layer w0.305: R28.1@215.011,202.272 215.138,202.145 215.139,202.146 C48.2@216.535,202.146 ; U11.3@215.674,219.29 214.189,217.805 213.995,217.805 213.995,205.105 214.884,204.216 R28.1@214.884,202.145 213.575,202.145 212.395,200.965 212.395,167.335 v1(215.9,163.83) ; v1(229.235,154.305) 229.235,155.575 230.57,156.91 U3.33@232.358,156.91
  Bottom Layer w0.305: v1(215.9,163.83) 219.71,163.83 220.345,164.465 222.25,164.465 223.52,163.195 223.52,156.845 224.79,155.575 227.965,155.575 v1(229.235,154.305)
MTR-R-OA: C45.2 C46.2 JBOTTOM1.2 U10.7 | length 55.3
  Top Layer w0.305: 269.875,251.206 270.409,251.74 271.145,251.74 ; 270.891,251.74 271.145,251.74 ; 272.69,251.74 271.145,251.74
  Top Layer w0.635: JBOTTOM1.2@241.26,256.54 241.26,257.088 240.284,258.064 237.109,258.064 236.347,257.302 236.347,251.46 238.76,249.047 267.716,249.047 269.621,250.952 269.875,251.206 270.002,251.333 ; C46.2@241.427,252.006 JBOTTOM1.2@241.427,256.373
MTR-R-OB: C46.1 C47.2 JBOTTOM1.1 U10.5 | length 40.4
  Top Layer w0.254: 270.657,253.04 270.815,253.04
  Top Layer w0.305: 270.815,253.04 272.69,253.04
  Top Layer w0.635: JBOTTOM1.1@238.76,256.54 238.76,251.714 240.068,250.406 C47.2@243.332,250.406 257.429,250.406 258.661,250.406 266.535,250.406 269.169,253.04 270.327,253.04 270.657,253.04
NetB1_2: B1.2 CFG1.2 | length 2.7
  Top Layer w0.635: CFG1.2@247.5,142.1 247.646,142.246 B1.2@250.093,142.246 B1.2@250.087,142.24
NetB1_5: B1.5 C2.1 D1.1 R3.1 | length 53.2
  Top Layer w0.254: R3.1@227.457,133.731 227.457,133.096 227.711,132.842 229.235,132.842 230.163,133.77 232.244,133.77 232.842,133.172 232.842,131.267 233.504,130.605 ; R3.1@227.457,133.77 229.274,133.77 229.87,134.366 C2.1@229.87,135.636 ; C2.1@230.124,135.509 230.173,135.46 D1.1@232.41,135.46 ; B1.5@252.984,142.24 B1.5@253.036,142.188
  Top Layer w0.635: 233.504,130.605 235.086,129.023 246.213,129.023 247.964,130.774 247.964,132.394 250.19,134.62 256.54,134.62 257.048,135.128 257.048,138.176 257.048,139.827 254.629,142.246 B1.5@253.093,142.246
NetC1_2: C1.2 Q1.2 R6.2 | length 14
  Top Layer w0.305: C1.2@214.757,135.636 214.757,134.366 215.392,133.731 217.258,133.731 R6.2@217.297,133.77 218.655,133.77 219.075,133.35 221.615,133.35 222.377,134.112 222.377,135.89 223.012,136.525 Q1.2@224.727,136.525